# Altium PCB GT1022_V3.PcbDoc (part 1 of 2)
Units mm, origin at the board's own origin, x right, y up, seen from the top; angles counter-clockwise.
Board outline 37.01 x 59.52 mm, 4 copper layers (L1, L2, L3, L4), stack 0.734 mm thick; 114 components, 83 nets, 524 pads, 318 vias.
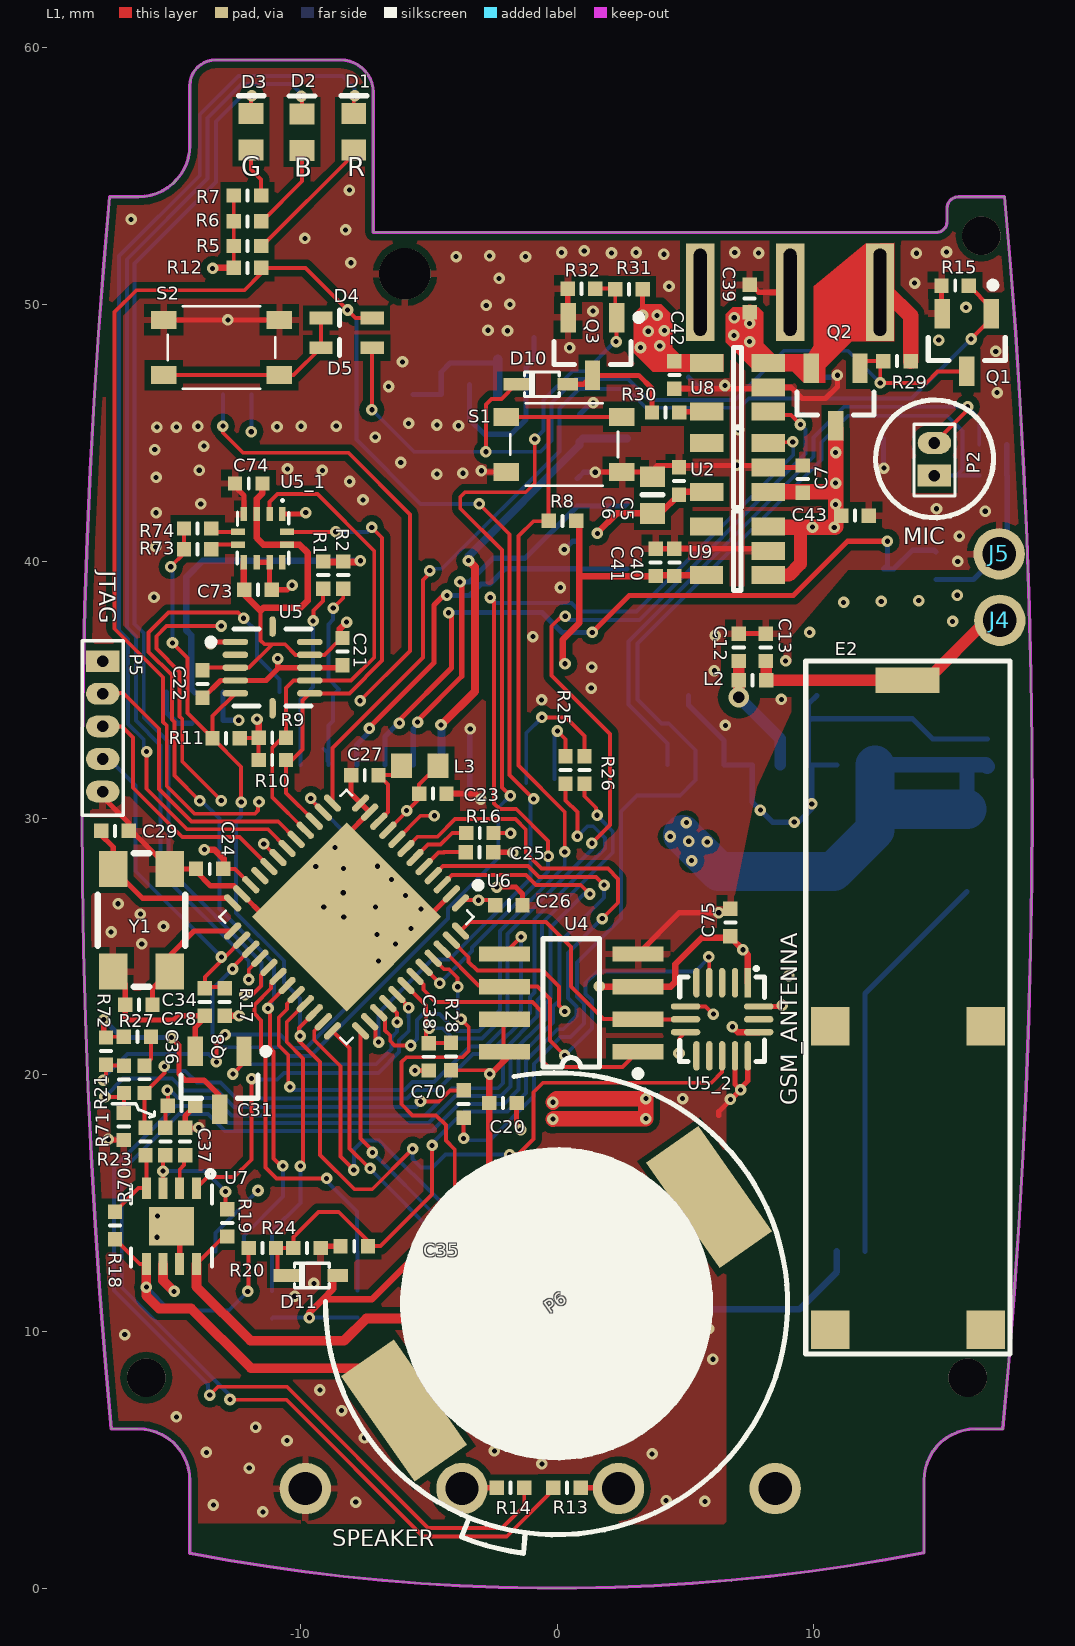
[diagram p0: L1 view]
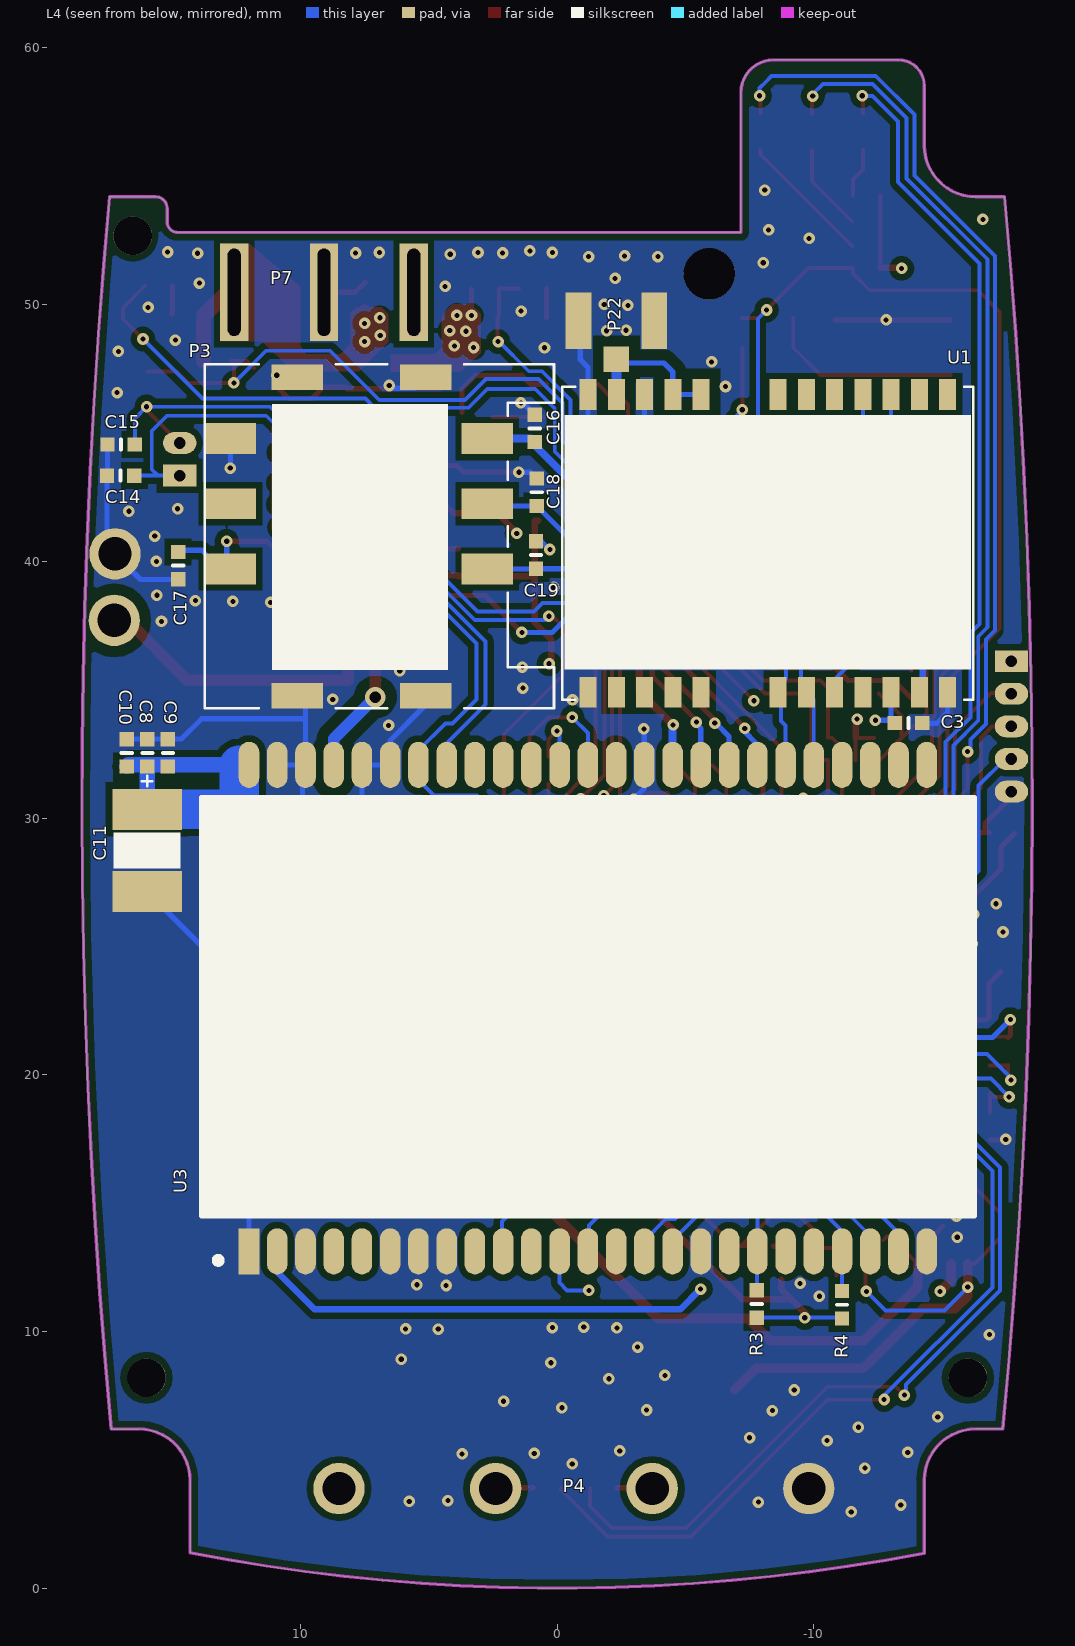
[diagram p1: L4 view, seen from below]
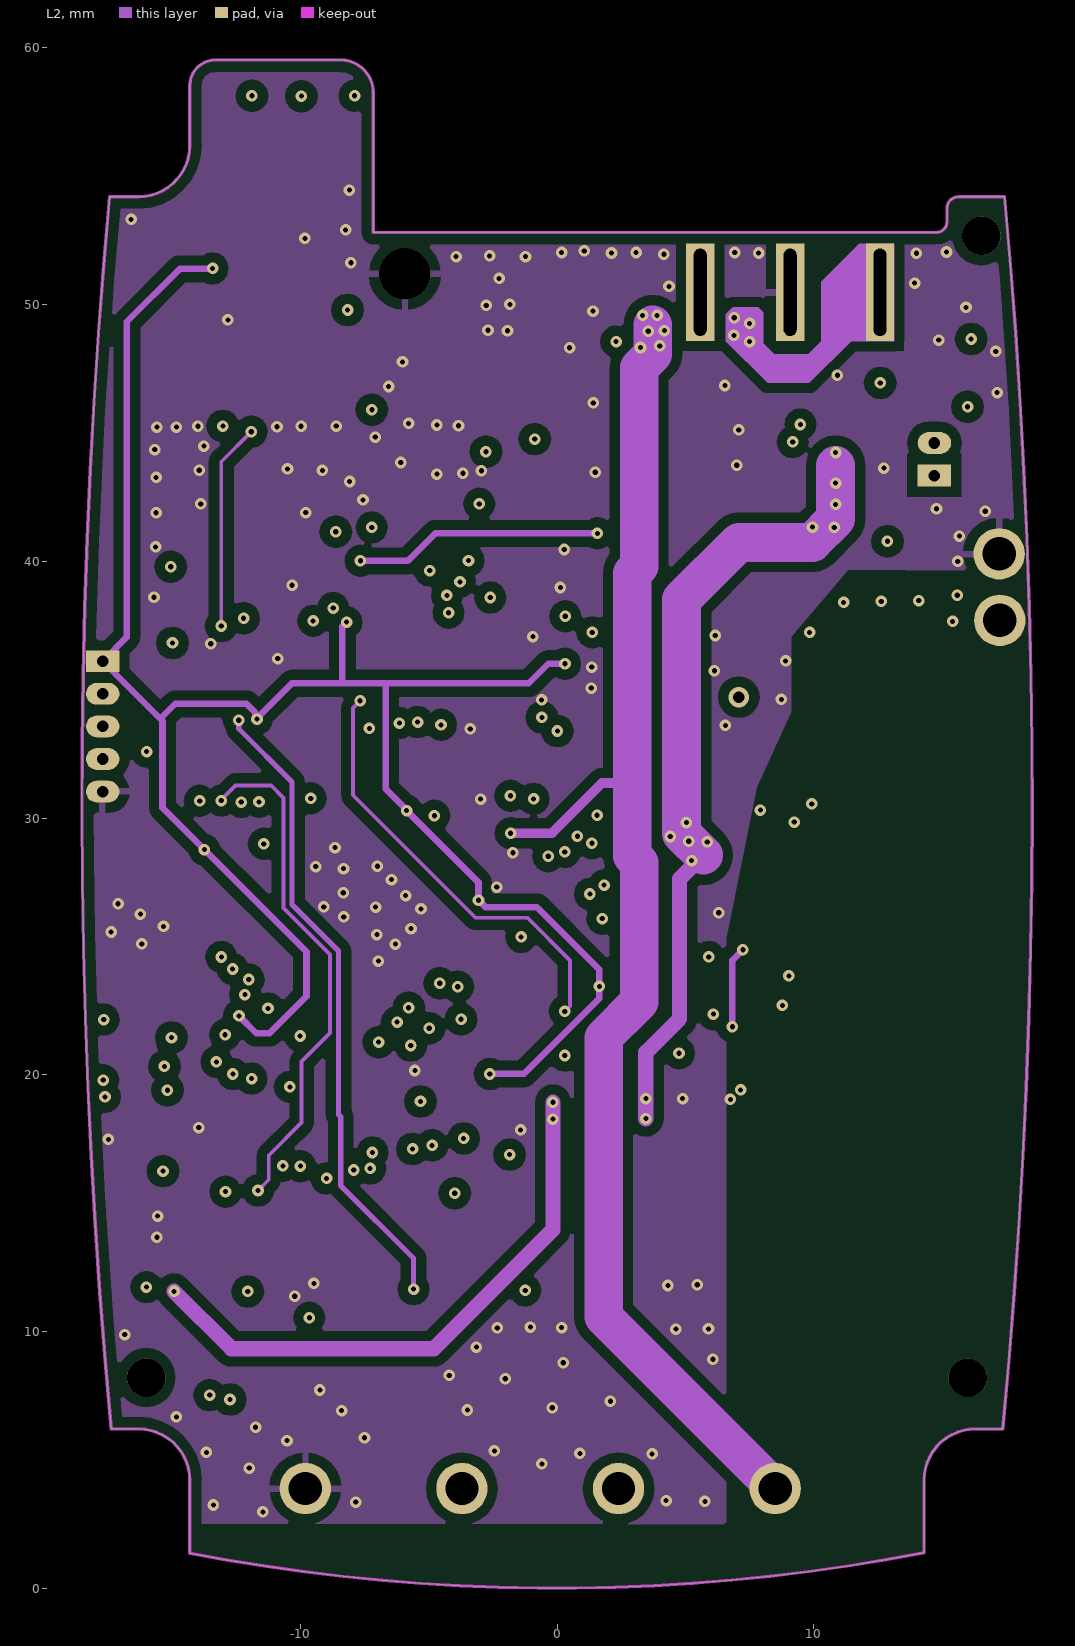
[diagram p2: L2]
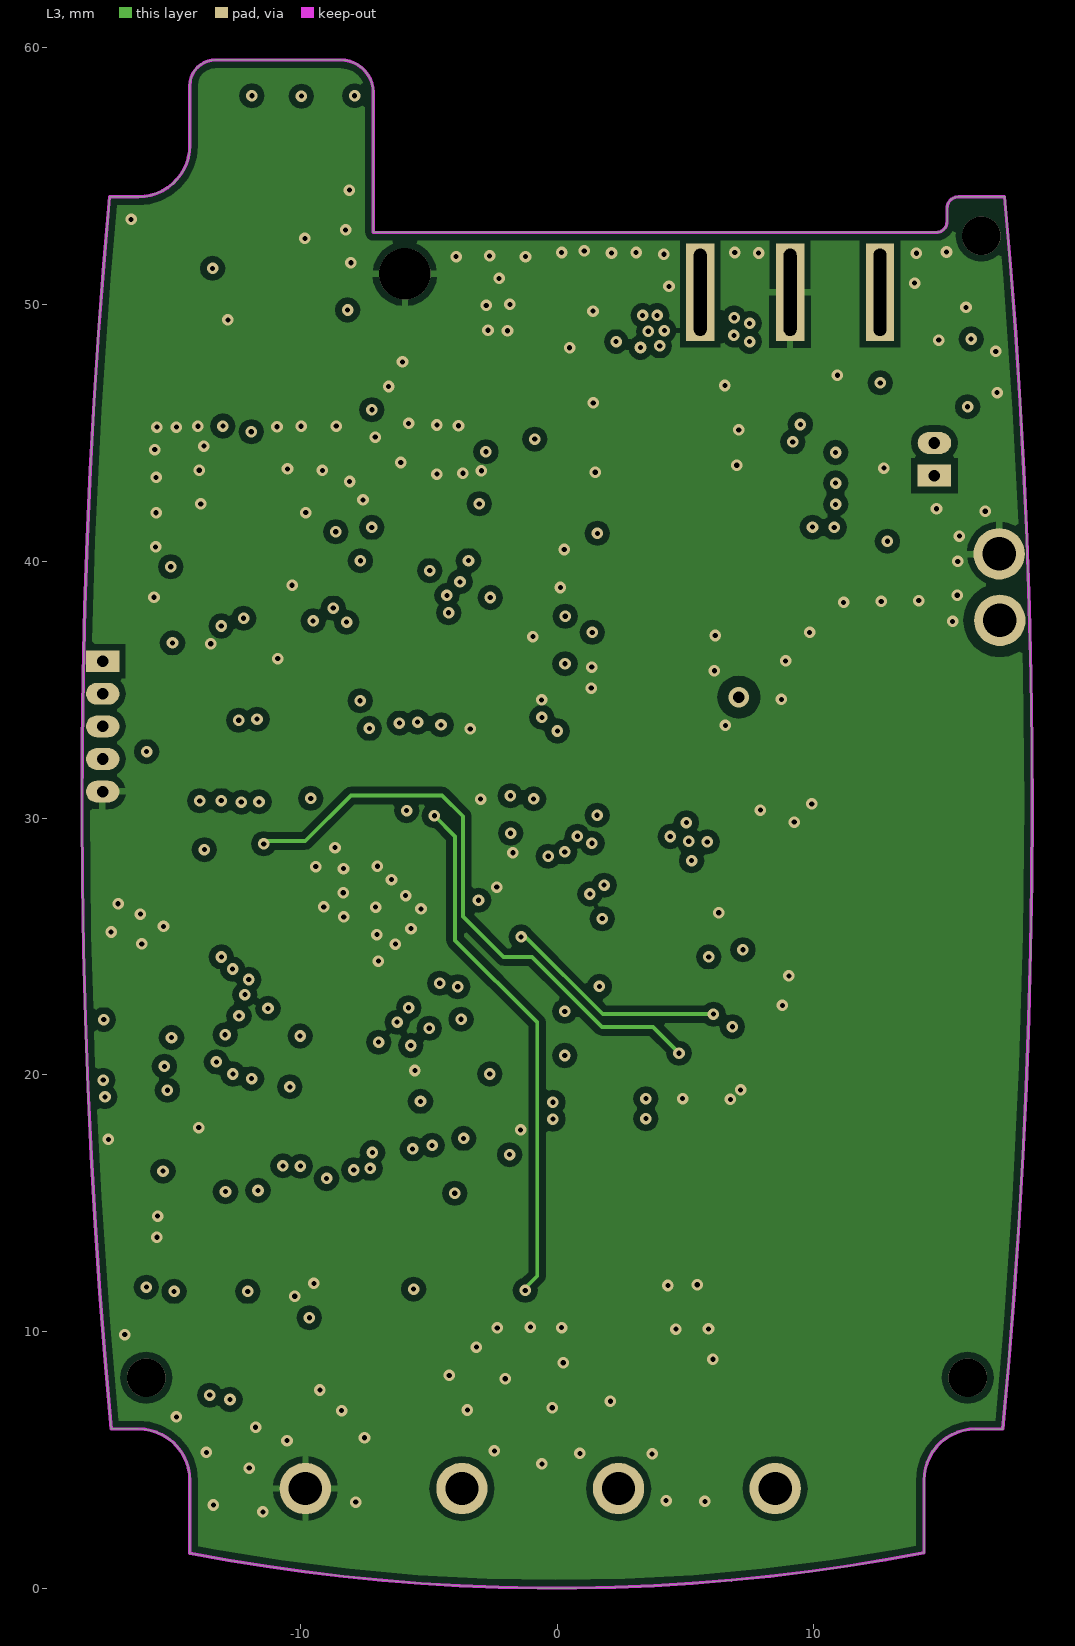
[diagram p3: L3]
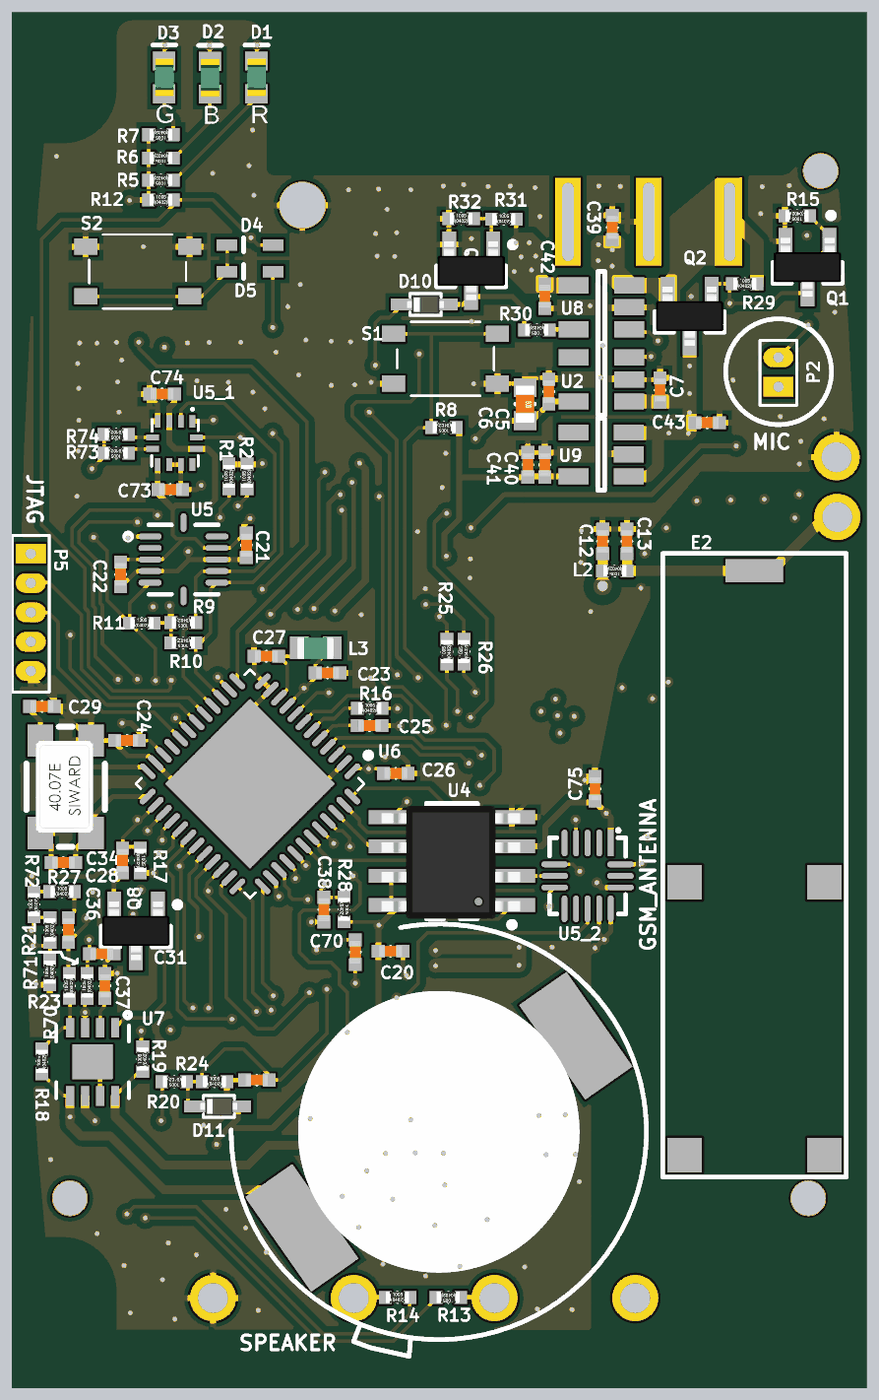
[diagram p5: 3D render of the assembled board from above, using the file's embedded part models]
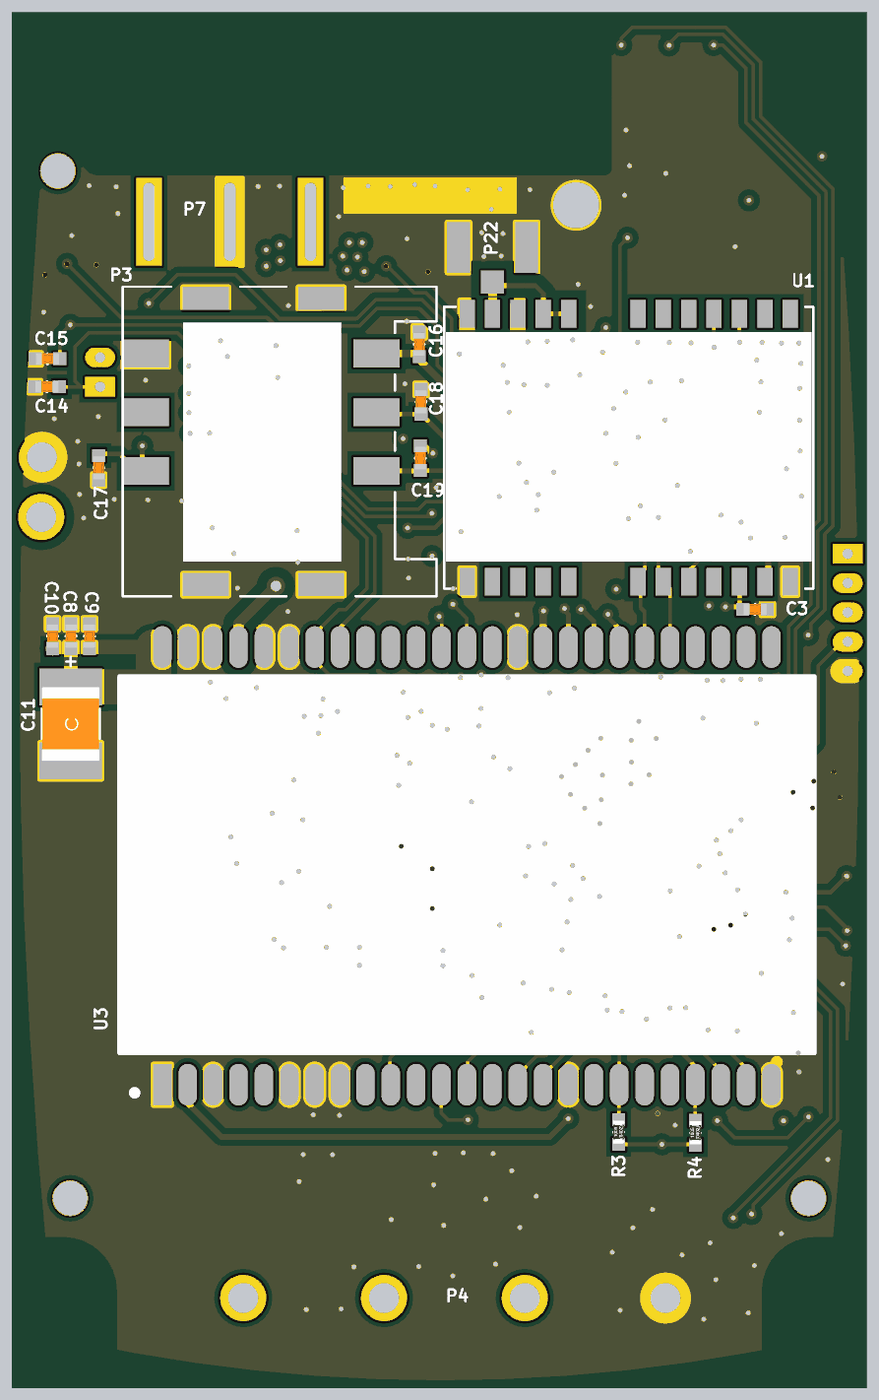
[diagram p6: 3D render of the assembled board from below, using the file's embedded part models]

## Layer stack, top to bottom
L1: signal copper 0.035
Dielectric: core 0.1981, FR-4, Dk 4.2
L2: signal copper 0.035
Dielectric: prepreg 0.1981, FR-4, Dk 4.2
L3: signal copper 0.035
Dielectric: core 0.1981, FR-4, Dk 4.2
L4: signal copper 0.035

## Board outline
-17.365,6.202 -16.305,6.202 cw(c-16.305,4.202) -14.305,4.202 -14.305,1.364 -14.306,1.363 ccw(c-0.048,75.346) 14.29,1.379 14.295,1.379 14.295,4.202 cw(c16.295,4.202) 16.295,6.202 16.298,6.198 17.365,6.198 ccw(c-242.05,30.57) 17.434,54.203 17.432,54.202 15.64,54.202 ccw(c15.64,53.752) 15.19,53.752 15.19,53.23 cw(c14.77,53.23) 14.77,52.81 -7.16,52.81 -7.16,58.26 ccw(c-8.43,58.26) -8.43,59.53 -13.305,59.53 ccw(c-13.305,58.53) -14.305,58.53 -14.305,56.202 cw(c-16.305,56.202) -16.305,54.202 -17.433,54.202 -17.433,54.204 ccw(c242.051,30.571)

## Design rules (kind name [scope] priority, off if disabled: settings)
Clearance L2-GND [InNamedPolygon('L2-GND')] p1: gap=0.4
Clearance L4-L3-GND-GPS [InNamedPolygon('L1-GND') Or  InNamedPolygon('L3-GND') Or  InNamedPolygon('L4-GND') Or  InNamedPolygon('L2-GND') vs (InNet('NetC12_2') OR InNet('NetC13_2') OR InNet('NetP22_1'))] p2: gap=0.43
Clearance L1-L4-GND-RULE-ALL [InNamedPolygon('L1-GND') Or  InNamedPolygon('L3-GND') Or  InNamedPolygon('L4-GND') Or  InNamedPolygon('L2-GND')] p3: gap=0.254
Clearance [All] p4: gap=0.15
ComponentClearance [All] p1: gap=0 collisioncheckmode=3 verticalgap=0 showdistances=FALSE
MinimumSolderMaskSliver [All] p1: minsoldermaskwidth=0.025
PolygonConnect L4-Pol [All vs IsNamedPolygon('L4-GND')] p1: connectstyle=Direct reliefconductorwidth=0.254 reliefentries=4 polygonreliefangle="90 Angle"
PolygonConnect [All vs isvia] p2: connectstyle=Direct reliefconductorwidth=0.254 reliefentries=4 polygonreliefangle="90 Angle"
RoutingVias ThruVia [All] p1: holewidth=0.2 width=0.45 viastyle="Through Hole" minholewidth=0.152 minwidth=0.45 maxholewidth=0.711 maxwidth=0.45
SilkscreenOverComponentPads [All] p1: minsilkscreentomaskgap=0.01
SolderMaskExpansion [All] p1: expansion=0.102
Width [All] p1: maxlimit=2 minlimit=0.152 preferedwidth=0.152
25 further rules are at their usual default settings.

## Classes and differential pairs
component class GSM/GPS: C3 C5 C6 C7 C8 C9 C10 C11 C12 C13 C14 C15 C16 C17 C18 C19 C55 C56 C57 C58 C59 C66 C67 C69 D9 D14 E1 E2 E3 J4 J5 L2 L68 L69 P2 P3 P10 P22 P33 R1 R2 R3 R4 R77 R78 U1 U2 U3 U15 U33
component class Main: Buzzer1 C20 C21 C22 C23 C24 C25 C26 C27 C28 C29 C31 C34 C35 C36 C37 C68 C70 C73 C74 C75 C85 C86 C87 C88 C89 C90 C91 D1 D2 D3 D4 D5 D7 D8 D11 DZ1 F2 F3 L3 P4 P5 P6 P40 Q1 Q6 Q8 Q9 R5 R6 R7 R8 R9 R10 R11 R12 R13 R14 R15 R16 R17 R18 R19 R20 R21 R23 R24 R25 R26 R27 R58 R63 R67 R68 R70 R71 R72 R73 R74 R82 R83 R84 R85 R86 R87 R89 R93 R94 R95 R96 R97 R98 S1 S2 TP24 TP25 TP26 TP28 TP29 TP30 U4 U5 U5_1 U5_2 U6 U7 U13 Y1
component class "Power Supply": C38 C39 C40 C41 C42 C43 D10 F1 P7 P8 Q2 Q3 Q4 R28 R29 R30 R31 R32 R43 R44 R45 R49 R50 R88 TP23 U8 U9

## Components (designator, comment, footprint, x,y, rotation, side; value= is the part's Value field where it differs from the comment)
C3 "100nF-16V-20%" C0402 -13.69,33.7 r0 bottom
C5 "100nF-16V-20%" C0402 4.75,43.13 r270 top
C6 "10uF-6V3-20%" C0603 3.72,43.292 r270 top
C7 "1uF-6V3-20%" C0402 9.57,43.2 r270 top
C8 "15p-50V-5%" C0402 15.96,32.54 r90 bottom
C9 "33p-50V-5%" C0402 15.16,32.54 r90 bottom
C10 "1uF-6V3-20%" C0402 16.76,32.54 r270 bottom
C11 "100u, ceramic" C1210 15.97,28.94 r90 bottom
C12 "47p-50V-5%" C0402 7.08,36.65 r270 top
C13 "47p-50V-5%" C0402 8.13,36.65 r270 top
C14 "27p-50V-5%" C0402 17,43.34 r180 bottom
C15 "27p-50V-5%" C0402 16.98,44.55 r180 bottom
C16 "100nF-16V-20%" C0402 0.87,45.18 r90 bottom
C17 "47p-50V-5%" C0402 14.76,39.83 r90 bottom
C18 "47p-50V-5%" C0402 0.79,42.69 r270 bottom
C19 "47p-50V-5%" C0402 0.82,40.25 r270 bottom
C20 "100nF-16V-20%" C0402 -2.11,18.9 r0 top
C21 "100nF-16V-20%" C0402 -8.36,36.48 r90 top
C22 "100nF-16V-20%" C0402 -13.81,35.22 r90 top
C23 "100nF-16V-20%" C0402 -4.84,30.95 r0 top
C24 "100nF-16V-20%" C0402 -13.53,28.02 r180 top
C25 "100nF-16V-20%" C0402 -3.02,28.67 r0 top
C26 "100nF-16V-20%" C0402 -1.88,26.6 r180 top
C27 "100nF-16V-20%" C0402 -7.49,31.67 r0 top
C28 "100nF-16V-20%" C0402 -13.721,22.83 r90 top
C29 "22p-50V-5%" C0402 -17.217,29.5 r180 top
C31 "1uF-6V3-20%" C0402 -14.627,18.786 r0 top
C34 "22p-50V-5%" C0402 -16.29,22.73 r180 top
C35 "100p-50V-5%" C0402 -7.901,13.322 r0 top
C36 "1uF-6V3-20%" C0402 -16.07,19.823 r90 top
C37 "100nF-16V-20%" C0402 -14.487,17.396 r270 top
C38 "100nF-16V-20%" C0402 -5,20.7 r90 top
C39 "10uF-6V3-20%" C0402 7.5,50.24 r270 top
C40 "100nF-16V-20%" C0402 3.84,39.96 r270 top
C41 "1uF-6V3-20%" C0402 4.57,39.96 r90 top
C42 "1uF-6V3-20%" C0402 4.57,47.26 r90 top
C43 "1uF-6V3-20%" C0402 11.61,41.78 r0 top
C70 "1uF-6V3-20%" C0402 -3.64,18.86 r270 top
C73 "100nF-16V-20%" C0402 -11.65,38.89 r180 top
C74 "100nF-16V-20%" C0402 -12.01,43.03 r0 top
C75 "100nF-16V-20%" C0402 6.75,25.93 r270 top
D1 "LED BLUE" LED0603-G -7.921,56.733 r0 top
D2 "LED RED" LED0603-G -9.936,56.719 r0 top
D3 "LED GREEN" LED0603-G -11.921,56.733 r0 top
D4 "BAT43XV2" SOD-523F#1 -8.2,49.48 r270 top
D5 "BAT43XV2" SOD-523F#1 -8.2,48.32 r270 top
D10 "BAT43XV2" SOD-523F#2 -0.59,46.9 r180 top
D11 "BAT43XV2" SOD-523F#2 -9.55,12.18 r180 top
E2 "GSM Antena conecter" A10343-GSM850/900/1800/1900/WCDMA 9.69,21.88 r270 top locked
J4 "touch_pin" TOUCH_PIN 17.25,37.7 r0 top
J5 "touch_pin" TOUCH_PIN 17.22,40.29 r0 top
L2 "12nH-5%" R0402 7.61,35.37 r180 top
L3 "1uH" L0603 -6.062,32.04 r0 top
P2 "MIC" HEADER_1.27mm_2PIN 14.7,43.34 r90 top locked
P3 "SIM CARD HOLDER" MICRO_SIM_SOCKET 7.72,40.97 r180 bottom locked
P4 "USB" GT102X_HOUSING_USB_NNECTOR 8.495,3.882 r180 bottom locked
P5 "JTAG" HEADER_1.27mm_5PIN -17.7,36.11 r270 top
P6 "Spk" SPEAKER-S12A28 -0.02,11.08 r125 top locked
P7 "Header 3" BAT_CON 12.579,50.48 r180 bottom locked
P22 "GPS Antena Connecter(NA)" "IPX SMD PCB Plug" -2.31,48.62 r0 bottom
Q1 "BSS138" SOT23-3 15.96,48.52 r270 top locked
Q2 "AO3401A" SOT23-3 10.85,46.4 r270 top locked
Q3 "BSS138" SOT23-3 1.38,48.37 r270 top
Q8 "BSS138" SOT23-3 -13.144,19.785 r270 top
R1 "4k7-5%" R0402 -9.11,39.46 r90 top
R2 "4k7-5%" R0402 -8.33,39.46 r90 top
R3 "10k-5%" R0402 -7.78,11.07 r90 bottom
R4 "10k-5%" R0402 -11.1,11.04 r90 bottom
R5 "1k-5%" R0402 -12.061,52.283 r180 top
R6 "1k-5%" R0402 -12.061,53.243 r180 top
R7 "1k-5%" R0402 -12.061,54.253 r180 top
R8 "100k-5%" R0402 0.21,41.577 r180 top
R9 "4k7-5%" R0402 -11.093,33.128 r180 top
R10 "4k7-5%" R0402 -11.093,32.258 r180 top
R11 "10k-5%" R0402 -12.89,33.11 r0 top
R12 "100k-5%" R0402 -12.061,51.43 r0 top
R13 "22-5%" R0402 0.39,3.91 r180 top
R14 "22-5%" R0402 -1.81,3.91 r0 top
R15 "100k-5%" R0402 15.51,50.74 r180 top
R16 "22-5%" R0402 -3.01,29.42 r0 top
R17 "10k-5%" R0402 -12.951,22.83 r270 top
R18 "47k-5%" R0402 -17.22,14.13 r90 top
R19 "47k-5%" R0402 -12.85,14.23 r90 top
R20 "4k7-5%" R0402 -11.48,13.25 r180 top
R21 "4k7-5%" R0402 -15.257,17.396 r90 top
R23 "4k7-5%" R0402 -16.034,17.399 r90 top
R24 "4k7-5%" R0402 -9.741,13.252 r0 top
R25 "4k7-5%" R0402 0.33,31.87 r90 top
R26 "4k7-5%" R0402 1.07,31.87 r90 top
R27 "4k7-5%" R0402 -16.35,21.48 r0 top
R28 "10k-5%" R0402 -4.13,20.71 r270 top
R29 "100k-5%" R0402 13.24,47.8 r0 top
R30 "1k1-5%" R0402 4.23,45.8 r180 top
R31 "100k-5%" R0402 2.8,50.6 r0 top
R32 "100k-5%" R0402 0.95,50.62 r0 top
R70 "10k-5%" R0402 -16.88,17.99 r90 top
R71 "10k-5%" R0402 -16.87,19.82 r90 top
R72 "4k7-5%" R0402 -17.57,20.92 r90 top
R73 "4k7-5%" R0402 -14,40.47 r180 top
R74 "4k7-5%" R0402 -14,41.28 r180 top
S1 "SW-DPST" BUTTON-TVAF11-025B-R 0.275,44.552 r270 top locked
S2 "SW-DPST" BUTTON-TVAF11-025B-R -13.071,48.33 r90 top locked
U1 "GT1612" GT1612 -8.21,40.7 r0 bottom locked
U2 "XC6209B332MRN_SOT-25" SOT23-5 7.03,43.653 r180 top locked
U3 "LEON G100" U-BLOX-G100 -1.2,22.595 r90 bottom locked
U4 "MX25L8005MC-15G_SOP-8L" SO8-150mil 0.55,22.8 r90 top
U5 "MMA7660FC" MMA7660FC -11.083,35.858 r0 top locked
U5_1 "BMA250" BMA250 -11.45,40.9 r270 top
U5_2 "ADXL362" ADXL362 6.43,22.16 r270 top
U6 "MKL25Z128VFT4" QFN50P700X700X80-48M -8.201,26.146 r225 top locked
U7 "TPA6203A1_DRB_8" DRB8_1P75X1P5 -15.024,14.107 r270 top
U8 "EMC5754" SOT23-5 7.03,46.78 r180 top locked
U9 "XC6209B332MRN_SOT-25" SOT23-5 7.02,40.41 r180 top
Y1 "8.000 MHZ" "SMD CRYSTAL 4 x 2.5" -16.19,26.02 r90 top

## Footprints (in the part's own frame and the unit in brackets; to place one, negate y for a bottom-side part, rotate by r counter-clockwise, add the part's x,y. Pads: shape width x height; smd on the part's side, far side on the other; paste and mask are expansions set on the pad)
A10343-GSM850/900/1800/1900/WCDMA [mm] "http://www.antenova-m2m.com/products/giganova-standard-antennas"
  rect 1x2.5 smd: 1(-13.49,3.96)
  rect 1.5x1.5 smd: 2(11.81,0.95) 3(11.81,7) 4(0,7) 5(0,0.95)
  silkscreen extent -14.24,0 12.76,7.95, body extent -14.25,0 12.76,7.95, height 3.3
ADXL362 [mm] "QFN, 16-Leads, Body 3.3x3.3mm (max), Pitch 0.50mm, IPC Medium Density"
  rect 1.15x0.25 smd: 1(-1.425,1)
  oval 1.15x0.25 smd: 2(-1.425,0.5) 3(-1.425,0) 4(-1.425,-0.5) 5(-1.425,-1) 9(1.425,-1) 10(1.425,-0.5) 11(1.425,0) 12(1.425,0.5) 13(1.425,1)
  oval 0.25x1.15 smd: 6(-0.5,-1.425) 7(0,-1.425) 8(0.5,-1.425) 14(0.5,1.425) 15(0,1.425) 16(-0.5,1.425)
  silkscreen extent -1.99,-1.65 1.65,1.65, body extent -1.65,-1.65 1.65,1.65, height 0.83
BAT_CON [mm]
  rect 1.1x3.8 hole 0.5 slot 3.4 at 90 deg: 1(0,0) 2(3.5,0) 3(7,0)
  body extent -0.23,-1.5 7.23,1.5, height 7
BMA250 [mm] "Accelerometer"
  rect 0.55x0.25 smd: 1(-0.94,0.75) 2(-0.94,0.25) 3(-0.94,-0.25) 4(-0.94,-0.75) 7(0.935,-0.75) 8(0.935,-0.25) 9(0.935,0.25) 10(0.935,0.75)
  rect 0.25x0.55 smd: 5(-0.25,-0.975) 6(0.25,-0.975) 11(0.25,0.93) 12(-0.25,0.93)
  silkscreen extent -1.47,-1.01 1,1, body extent -1,-1 1,1, height 0.83
BUTTON-TVAF11-025B-R [mm] "TVAF11-025B-R"
  rect 0.7x1 smd: 1(1.075,2.25) 2(1.075,-2.25) 3(-1.075,2.25) 4(-1.075,-2.25)
  silkscreen extent -1.6,-2.1 1.6,2.1, body extent -1.6,-2.1 1.6,2.1, height 2.5
C0402 [mil]
  rect 22x22 smd: 1(-21,0) 2(21,0)
  silkscreen extent 0,-8 0,8, body extent -20,-10 20,10, height 20
C0603 [mil]
  rect 32x38 smd: 1(0,0) 2(56,0)
  silkscreen extent 28,-16 28,16, body extent -4,-16 59,16, height 12
C1210 [mm] "Chip Capacitor; Body 3.2 x 2.5 mm (LxW typ)"
  rect 1.6x2.7 smd: 1(1.4,0) 2(-1.8,0)
  silkscreen extent -0.9,-1.3 2.7,1.3, body extent -2.3,-1.35 1.9,1.35
DRB8_1P75X1P5 [mm]
  rect 0.85x0.35 smd: 1(-1.475,0.975) 2(-1.475,0.325) 3(-1.475,-0.325) 4(-1.475,-0.975) 5(1.475,-0.975) 6(1.475,-0.325) 7(1.475,0.325) 8(1.475,0.975)
  rect 1.5x1.75 smd: 9(0,0)
  silkscreen extent -2.16,-1.57 1.57,1.65
GT102X_HOUSING_USB_NNECTOR [mm]
  round 2 hole 1.3: 1(0,0) 2(6.1,0) 3(12.2,0) 4(18.3,0)
  body extent -1.01,-1.01 19.32,1.01, height 4.1
GT1612 [mm]
  rect 0.66x1.2 smd: 1(-7,-5.8) 2(-5.9,-5.8) 3(-4.8,-5.8) 4(-3.7,-5.8) 5(-2.6,-5.8) 6(-1.5,-5.8) 7(-0.4,-5.8) 8(2.6,-5.8) 9(3.7,-5.8) 10(4.8,-5.8) 11(5.9,-5.8) 12(7,-5.8) 13(7,5.8) 14(5.9,5.8) 15(4.8,5.8) 16(3.7,5.8) 17(2.6,5.8) 18(-0.4,5.8) 19(-1.5,5.8) 20(-2.6,5.8) 21(-3.7,5.8) 22(-4.8,5.8) 23(-5.9,5.8) 24(-7,5.8)
  silkscreen extent -8,-6.1 8,6.1, body extent -8,-6.1 8,6.1, height 2.5
HEADER_1.27mm_2PIN [mm]
  rect 0.85x1.3 hole 0.45: 1(0,0)
  oval 0.85x1.3 hole 0.45: 2(1.27,0)
  silkscreen extent -0.8,-0.8 2,0.8
HEADER_1.27mm_5PIN [mm]
  rect 0.85x1.3 hole 0.45: 1(0,0)
  oval 0.85x1.3 hole 0.45: 2(1.27,0) 3(2.54,0) 4(3.81,0) 5(5.08,0)
  silkscreen extent -0.8,-0.8 6,0.8
"IPX SMD PCB Plug" [mm]
  rect 1x1 smd: 1(0,0.75)
  rect 1x2.2 smd: 2(1.475,-0.75) 3(-1.475,-0.75)
L0603 [mil]
  rect 32x38 smd: 1(0,0) 2(56,0)
  body extent -4,-20 59,18, height 16
LED0603-G [mil]
  rect 38x32 smd: 1(0,-28) 2(0,28)
  silkscreen extent -19,55 20,55, body extent -16,-32 16,32, height 43
MICRO_SIM_SOCKET [mm] "http://www.fcn.com.tw/zh/product/ProductList.aspx?Type=13"
  rect 2x1.2 smd: 1(5,3.81) 2(5,1.27) 3(5,-1.27) 5(-5,3.81) 6(-5,1.27) 7(-5,-1.27)
  rect 2x1 smd: 8(-2.4,-6.2) 9(2.6,-6.2) 10(2.6,6.2) 11(-2.4,6.2)
  silkscreen extent -6,-6.7 7.6,6.7, body extent -6,-6.7 7.6,6.7, height 2.6
MMA7660FC [mm] "QFN, 12-Leads, Body 3,0x3,0mm (max), Pitch 0,50mm, IPC Medium Density"
  oval 1x0.25 smd: 1(-1.45,1) 2(-1.45,0.5) 3(-1.45,0) 4(-1.45,-0.5) 5(-1.45,-1) 6(1.45,-1) 7(1.45,-0.5) 8(1.45,0) 9(1.45,0.5) 10(1.45,1)
  oval 0.25x0.8 smd: 11(0,-1.58) 12(0,1.6)
  silkscreen extent -2.52,-1.5 1.5,1.5, body extent -1.5,-1.5 1.5,1.5, height 0.9
QFN50P700X700X80-48M [mm] "QFN, 48-Leads, Body 7.0x7.0mm (max), Pitch 0.50mm, IPC Low Density"
  oval 0.85x0.254 smd: 1(-3.525,2.75) 2(-3.525,2.25) 3(-3.525,1.75) 4(-3.525,1.25) 5(-3.525,0.75) 6(-3.525,0.25) 7(-3.525,-0.25) 8(-3.525,-0.75) 9(-3.525,-1.25) 10(-3.525,-1.75) 11(-3.525,-2.25) 12(-3.525,-2.75) 25(3.525,-2.75) 26(3.525,-2.25) 27(3.525,-1.75) 28(3.525,-1.25) 29(3.525,-0.75) 30(3.525,-0.25) 31(3.525,0.25) 32(3.525,0.75) 33(3.525,1.25) 34(3.525,1.75) 35(3.525,2.25) 36(3.525,2.75)
  oval 0.254x0.85 smd: 13(-2.75,-3.525) 14(-2.25,-3.525) 15(-1.75,-3.525) 16(-1.25,-3.525) 17(-0.75,-3.525) 18(-0.25,-3.525) 19(0.25,-3.525) 20(0.75,-3.525) 21(1.25,-3.525) 22(1.75,-3.525) 23(2.25,-3.525) 24(2.75,-3.525) 37(2.75,3.525) 38(2.25,3.525) 39(1.75,3.525) 40(1.25,3.525) 41(0.75,3.525) 42(0.25,3.525) 43(-0.25,3.525) 44(-0.75,3.525) 45(-1.25,3.525) 46(-1.75,3.525) 47(-2.25,3.525) 48(-2.75,3.525)
  rect 5.2x5.2 smd: 49(0,0)
  silkscreen extent -4.62,-3.5 3.5,3.5, body extent -3.5,-3.5 3.5,3.5, height 0.8
R0402 [mil]
  rect 22x22 smd: 1(-21,0) 2(21,0)
  silkscreen extent 0,-8 0,8, body extent -20,-10 20,10, height 14
"SMD CRYSTAL 4 x 2.5" [mm]
  rect 1.4x1.1 smd: 1(-2,-1.1) 2(2,-1.1) 3(2,1.1) 4(-2,1.1)
  silkscreen extent -2.6,-1.7 2.6,1.7, body extent -2,-1.2 2,1.3, height 0.63
SO8-150mil [mm] "Small Outline; 8 Leads; Body Width 3.9 mm; Pitch 1.27 mm"
  rect 0.6x2 smd: 1(-1.905,-2.6) 2(-0.635,-2.6) 3(0.635,-2.6) 4(1.905,-2.6) 5(1.905,2.6) 6(0.635,2.6) 7(-0.635,2.6) 8(-1.905,2.6)
  silkscreen extent -2.88,-2.72 2.5,1.1, body extent -2.5,-2.95 2.4,3.05, height 1.7
SOD-523F#1 [mm] "Molded Inductor, 2-Leads, Body 1.2x0.8mm, IPC Medium Density"
  rect 0.5x0.9 smd: 1(0,-1) 2(0,1)
  silkscreen extent -0.31,-0.28 0.29,-0.28, body extent -0.45,-0.65 0.45,0.65, height 0.7
SOD-523F#2 [mm]
  rect 0.8x0.5 smd: 1(-1,0)
  rect 1x0.5 smd: 2(1,0)
  silkscreen extent -0.67,-0.48 0.67,0.48, body extent -0.8,-0.4 0.8,0.4, height 0.72
SOT23-3 [mm] "SOT23, 3-Leads, Body 2.9x1.3mm, Pitch 0.95mm, Lead Span 2.4mm, IPC Medium Density"
  rect 1.15x0.6 smd: 1(-1.125,0.95) 2(-1.125,-0.95) 3(1.125,0)
  silkscreen extent -2.36,-1.5 0.7,1.5, body extent -1.27,-1.46 1.28,1.46, height 0.99
SOT23-5 [mm] "SOT23, 5-Leads, Body 2.9x1.6mm, Pitch 0.95mm, Lead Span 2.8mm, IPC Low Density"
  rect 1.3x0.7 smd: 1(-1.2,0.95) 2(-1.2,0) 3(-1.2,-0.95) 4(1.2,-0.95) 5(1.2,0.95)
  silkscreen extent -0.15,-1.55 0.15,1.55, body extent -0.9,-1.55 0.9,1.55, height 1.45
SPEAKER-S12A28 [mm]
  rect 5x2.5 smd: 1(0,7.25) 2(0,-7.25)
  silkscreen extent -9,-9 8.2,9, body extent -9,-9 9,9, height 4.3
TOUCH_PIN [mm]
  round 2 hole 1.3: 1(0,0)
  body extent -1,-1.01 1.02,1.01, height 4.1
U-BLOX-G100 [mm]
  rect 1.8x0.8 smd: 1(-9.475,13.2)
  oval 1.8x0.8 smd: 2(-9.475,12.1) 3(-9.475,11) 4(-9.475,9.9) 5(-9.475,8.8) 6(-9.475,7.7) 7(-9.475,6.6) 8(-9.475,5.5) 9(-9.475,4.4) 10(-9.475,3.3) 11(-9.475,2.2) 12(-9.475,1.1) 13(-9.475,0) 14(-9.475,-1.1) 15(-9.475,-2.2) 16(-9.475,-3.3) 17(-9.475,-4.4) 18(-9.475,-5.5) 19(-9.475,-6.6) 20(-9.475,-7.7) 21(-9.475,-8.8) 22(-9.475,-9.9) 23(-9.475,-11) 24(-9.475,-12.1) 25(-9.475,-13.2) 26(9.475,-13.2) 27(9.475,-12.1) 28(9.475,-11) 29(9.475,-9.9) 30(9.475,-8.8) 31(9.475,-7.7) 32(9.475,-6.6) 33(9.475,-5.5) 34(9.475,-4.4) 35(9.475,-3.3) 36(9.475,-2.2) 37(9.475,-1.1) 38(9.475,0) 39(9.475,1.1) 40(9.475,2.2) 41(9.475,3.3) 42(9.475,4.4) 43(9.475,5.5) 44(9.475,6.6) 45(9.475,7.7) 46(9.475,8.8) 47(9.475,9.9) 48(9.475,11) 49(9.475,12.1) 50(9.475,13.2)
  silkscreen extent -9.95,-15.05 8.2,15.05, body extent -9.5,-15.05 9.5,15.05, height 3.2

## Part data
C3 C5 C16 C20 C21 C22 C23 C24 C25 C26 C27 C28 C37 C38 C40 C73 C74 C75: library part Cap, "CAP CER 0.1UF 16V Y5V 0402"
C6 C39: library part Cap, "CAP CER 10UF 6.3V 20% X5R 0603"
C7 C10 C31 C36 C41 C42 C43 C70: library part Cap, "CAP CER 1UF 6.3V Y5V 0402"
C8: library part Cap, "CAP CER 15PF 50V 5% NPO 0402"
C9: library part Cap, "CAP CER 33PF 50V 5% NPO 0402"
C11: library part "Cap Pol3", "CAP CER 100UF 10V 20% X5R 1812"
C12 C13 C17 C18 C19: library part Cap, "CAP CER 47PF 50V 5% NPO 0402"
C14 C15: library part Cap, "CAP CER 27PF 50V 5% NPO 0402"
C29 C34: library part Cap, "CAP CER 22PF 50V 5% NPO 0402"
C35: library part Cap, "CAP CER 100PF 50V 5% NPO 0402"
D1: library part LED2, "LED BLUE CLEAR THIN 0603 SMD"
D2: library part LED2, "LED RED CLEAR THIN 0603 SMD"
D3: library part LED2, "LED GREEN CLEAR THIN 0603 SMD"
D4 D5 D10 D11: library part Diode, "Diode Type SMD"
E2 P5: library part "Header 5", "Header, 5-Pin"
J4 J5: library part Socket, "Socket"
L2: library part Inductor, "INDUCTOR 12NH 300MA 0402"
L3: library part Inductor, "INDUCTOR 1.0UH 150MA 0603"
P2 P6: library part "Header 2", "Header, 2-Pin"
P3: library part "SIM CARD", "SIM _CONNECTOR_410108105011-2LF"
P4: library part "Header 4", "Header, 4-Pin"
P7: "Header, 3-Pin"
P22: library part "Header 3", "GPS Antena"
Q1 Q3 Q8: library part MOSFET-P, "MOSFET N-CH 50V 200MA SOT23-3"
Q2: library part MOSFET-P, "MOSFET P-CH -30V -4.3A SOT23"
R1 R2 R9 R10 R20 R21 R23 R24 R25 R26 R27 R72 R73 R74: library part Res1, "RES 4.7K OHM 1/16W 5% 0402 SMD"
R3 R4 R11 R17 R28 R70 R71: library part Res1, "RES 10K OHM 1/16W 5% 0402 SMD"
R5 R6 R7: library part Res1, "RES 1.0K OHM 1/16W 5% 0402 SMD"
R8 R12 R15 R29 R31 R32: library part Res1, "RES 100K OHM 1/16W 5% 0402 SMD"
R13 R14 R16: library part Res1, "RES 22 OHM 1/16W 5% 0402 SMD"
R18 R19: library part Res1, "RES 47K OHM 1/16W 5% 0402 SMD"
R30: library part Res1, "RES 1.1K OHM 1/16W 5% 0402 SMD"
S1 S2: "Double-Pole, Single-Throw Switch"
U1: library part GPS-GT1612
U3: library part ublox
U4: library part FlashIC
U5: "ACCELEROMETER 3X3 DGTL 10-DFN"
U5_1: "3-AXIS ACCELEROMETER DIGITAL I/F"
U5_2: library part ADCL362, "IC ACCEL DIG LO PWR 3AX 16LGA"
U6: "IC ARM CORTEX MCU 128KB 48QFN"
U7: "IC AMP AUDIO PWR 1.25W MONO 8SON"
Y1: library part CRYSTAL-SMT, "CRYSTAL 8.000 MHZ 18PF SMD"

## Free pads (board coordinates)
  round 0.127 on Mech7: 1(-17.311,43.735) 1(-17.311,43.735) 1(-17.311,44.37) 1(-17.311,44.37) 1(-17.311,44.751) 1(-17.311,44.751) 1(-17.311,45.386) 1(-17.311,45.386) 1(-17.311,45.767) 1(-17.311,45.767) 1(-17.311,46.402) 1(-17.311,46.402) 1(-16.041,43.735) 1(-16.041,43.735) 1(-16.041,44.37) 1(-16.041,44.37) 1(-16.041,44.751) 1(-16.041,44.751) 1(-16.041,45.386) 1(-16.041,45.386) 1(-16.041,45.767) 1(-16.041,45.767) 1(-16.041,46.402) 1(-16.041,46.402)
  round 0.127 on Mech4: 1(-16.321,46.407) 1(-16.321,46.407) 1(5.346,49.003) 1(5.346,49.003) 1(5.346,52.003) 1(5.346,52.003) 1(5.846,49.003) 1(5.846,49.003) 1(5.846,52.003) 1(5.846,52.003) 1(8.834,49.003) 1(8.834,49.003) 1(8.834,52.003) 1(8.834,52.003) 1(9.334,49.003) 1(9.334,49.003) 1(9.334,52.003) 1(9.334,52.003) 1(12.334,49.003) 1(12.334,49.003) 1(12.334,52.003) 1(12.334,52.003) 1(12.834,49.003) 1(12.834,49.003) 1(12.834,52.003) 1(12.834,52.003)
  round 0.127 on Mech5: 1(-16.305,6.202) 1(-16.305,6.202) 1(-14.305,4.202) 1(-14.305,4.202) 1(14.295,4.202) 1(14.295,4.202) 1(16.295,6.202) 1(16.295,6.202) 1(16.655,8.202)
  round 1.5 hole 1.5: 1(-16.005,8.202) 1(15.995,8.202) 1(16.529,52.683)
  round 0.127 on Mech6: 1(-15.914,40.941) 1(-11.414,40.941)
  round 0.127 on Mech2: 1(-14.15,45.724) 1(-14.15,45.724) 1(-14.15,48.924) 1(-14.15,48.924) 1(-12.866,46.752) 1(-12.866,46.752) 1(-12.866,48.022) 1(-12.866,48.022) 1(-10.961,46.752) 1(-10.961,46.752) 1(-10.961,48.022) 1(-10.961,48.022) 1(-9.65,45.724) 1(-9.65,45.724) 1(-9.65,48.924) 1(-9.65,48.924) 1(-1.577,42.834) 1(-1.577,42.834) 1(-1.577,46.034) 1(-1.577,46.034) 1(-0.293,43.862) 1(-0.293,43.862) 1(-0.293,45.132) 1(-0.293,45.132) 1(1.612,43.862) 1(1.612,43.862) 1(1.612,45.132) 1(1.612,45.132) 1(2.923,42.834) 1(2.923,42.834) 1(2.923,46.034) 1(2.923,46.034)
  round 2 hole 2: 1(-5.93,51.2)

## Via types
v1: diameter 0.45, hole 0.2, L1 to L4, 317 vias
v2: diameter 0.8, hole 0.45, L1 to L4, 1 vias

## Nets (pads, with @x,y where several pads share a name; then routed paths per layer and width w, separated by ;. In a path a pad name is that pad's centre, name@x,y a point inside that pad or via, vN(x,y) a via of type N, cw(c..) or ccw(c..) an arc to the next point about the centre after c; other vN are vias at no path point)
3V3: C20.1 C21.2 C22.2 C23.1 C24.1 C26.2 C40.2 C41.1 C73.2 C74.2 C75.2 D11.1 L3.2 P5.1 R3.1 R4.1 R5.2 R6.2 R7.2 R8.1 R9.2 R10.2 R11.2 R12.1 R17.2 R28.2 U4.3 U4.7 U4.8 U5.3 U5.9 U5_1.3 U5_1.7 U5_1.11 U5_2.1 U5_2.14 U6.1 U6.9 U6.22 U9.5 | length 158.1
  L1 w0.152: C22.2@-13.81,35.753 -13.705,35.858 U5.3@-12.533,35.858 -12.002,35.858 -11.09,36.77 ; C24.1@-12.997,28.02 -12.55,28.02 U6.22@-11.931,27.402 ; R12.1@-12.594,51.43 R5.2@-12.594,52.283 R6.2@-12.594,53.243 R7.2@-12.594,54.253 ; R11.2@-12.357,33.11 -11.644,33.11 R9.2@-11.626,33.128 R10.2@-11.626,32.258 ; C73.2@-12.183,38.703 C73.2@-12.183,38.89 ; -11.55,38.07 -11.55,36.92 -11.4,36.77 -11.09,36.77 ; C21.2@-8.46,36.963 -9.065,36.358 U5.9@-9.633,36.358 -10.188,36.358 -10.6,36.77 -11.09,36.77 ; U6.9@-6.593,29.523 C23.1@-5.339,30.776 ; C23.1@-5.373,30.95 -5.373,31.307 L3.2@-4.64,32.04 ; R28.2@-4.13,20.177 -2.622,20.177 -2.547,20.103 -2.527,20.083 v1@-2.47,20.025 ; U6.1@-3.764,26.694 -3.659,26.8 v1(-3.06,26.8) C26.2@-2.403,26.8 ; v1@-2.643,19.852 v1@-2.47,20.025 ; v1@-2.47,20.03 v1@-2.47,20.025 ; U4.8@-2.08,20.875 U4.7@-2.08,22.08 ; C40.2@3.84,39.427 C40.2@3.873,39.46
  L1 w0.254: v1(-13.74,28.77) -13.35,28.77 -12.99,28.41 -12.99,28.027 C24.1@-12.997,28.02 ; v1(-13.42,51.41) -13.4,51.43 R12.1@-12.594,51.43 ; R17.2@-12.951,22.297 -12.397,22.297 v1(-12.39,22.29) ; U5_1.7@-12.2,39.965 -12.2,38.907 C73.2@-12.183,38.89 ; C73.2@-12.183,38.703 -11.55,38.07 -11.42,38.2 -9.98,38.2 -9.72,38.46 -9.72,40.34 -10.03,40.65 U5_1.11@-10.52,40.65 -11.44,40.65 -11.7,40.91 U5_1.3@-11.7,41.84 -11.7,42.43 -11.477,42.653 C74.2@-11.477,43.03 ; R9.2@-11.626,33.128 v1@-11.626,33.686 ; v1(-9.65,10.537) -9.66,10.547 -9.66,10.72 -9.13,11.25 ; D11.1@-8.725,12.005 -8.725,11.655 -9.13,11.25 ; C21.2@-8.46,36.963 -8.46,37.37 v1(-8.2,37.63) ; v1@-2.643,19.852 C20.1@-2.643,18.9 -2.643,15.827 -7.22,11.25 -9.13,11.25 ; v1@-2.585,20.025 -2.527,20.083 U4.8@-1.8,20.81 ; v1@0.31,36.07 0.22,36.07 0.22,36.95 0.873,37.603 0.873,39.44 ; R8.1@0.743,41.577 0.873,41.577 0.873,39.44 ; v1(1.65,23.44) 1.655,23.435 U4.3@3.15,23.435 4.425,23.435 4.6,23.61 4.6,24.3 5.64,25.34 6.77,25.34 v1(7.24,24.87) 7.43,24.68 U5_2.1@7.43,23.585 ; C40.2@3.84,39.427 0.887,39.427 0.873,39.44 ; C40.2@3.873,39.46 U9.5@5.82,39.46 ; v1(6.83,21.87) 7.04,21.66 U5_2.14@7.855,21.66
  L2 w0.254: v1(-13.42,51.41) -13.4,51.41 -13.38,51.39 -14.699,51.39 -16.759,49.33 -16.759,37.051 P5.1@-17.7,36.11 -15.455,33.865 ; v1(-12.39,22.29) -11.72,21.62 -11.2,21.62 -9.76,23.06 -9.76,24.79 v1(-13.74,28.77) -15.37,30.4 -15.37,33.78 -15.455,33.865 ; v1(-8.2,37.63) -8.36,37.47 -8.36,35.25 ; v1(-5.86,30.29) -3.06,27.49 v1(-3.06,26.8) -2.79,26.53 -0.79,26.53 1.64,24.1 v1@1.64,23.43 ; v1@-5.86,30.32 -6.68,31.14 -6.68,35.23 -6.7,35.25 ; v1(-2.62,20.03) -1.3,20.03 1.64,22.97 v1@1.64,23.43 ; v1(0.31,36.01) -0.34,36.01 -1.1,35.25 -6.7,35.25 ; v1@1.65,23.43 v1@1.64,23.43 ; v1(1.65,23.44) v1@1.64,23.43 ; v1(6.83,21.87) 6.83,24.46 v1(7.24,24.87) ; -15.455,33.865 -14.87,34.45 -12.1,34.45 -11.76,34.11 -11.76,33.82 -10.33,35.25 -8.36,35.25 ; -8.36,35.25 -6.7,35.25
  L4 w0.152: R4.1@-11.1,10.507 -11.07,10.537 v1(-9.65,10.537) R3.1@-7.78,10.537
  other v1: -11.689,33.851
5V: C42.2 P4.1 R16.2 R31.2 U8.4 | length 59.9
  L1 w0.152: R16.2@-2.477,29.42 -1.82,29.42 v1(-1.81,29.41)
  L1 w0.2: R31.2@3.333,50.6 v1(3.333,49.58) 3.333,49.03 C42.2@4.57,47.793 5.767,47.793 U8.4@5.83,47.73
  L2 w0.381: v1(-1.81,29.41) -0.2,29.41 1.75,31.36 2.93,31.36
  L2 w1.5: 3.73,49.22 3.73,48.96 3.73,48.067 3.2,47.537 3.2,39.81 2.93,39.54 2.93,31.36 2.93,28.53 3.2,28.26 3.2,22.84 1.81,21.45 1.81,10.566 P4.1@8.495,3.882
  other v1: 3.25,48.33 4,48.39 3.55,48.96 4.18,48.99 3.9,49.58
ACCEL_CS: U5_2.8 U6.19 | length 25.3
  L1 w0.152: v1@-11.53,29.1 v1(-11.424,28.994) -10.892,28.462 U6.19@-10.871,28.462 ; v1(4.75,20.84) 4.76,20.83 4.76,21.415 U5_2.8@5.005,21.66
  L3 w0.152: v1@-11.53,29.1 -9.81,29.1 -8.03,30.88 -4.48,30.88 -3.671,30.071 -3.671,26.171 -2.08,24.58 -0.976,24.58 1.744,21.86 3.73,21.86 v1(4.75,20.84)
ACCL_INT: R11.1 R73.2 R74.2 U5.5 U5_2.11 U6.34 | length 51.1
  L1 w0.152: v1(-15.05,39.79) -14.533,40.307 R73.2@-14.533,40.47 R74.2@-14.533,41.28 ; v1(-14.98,36.82) -14.4,36.24 -14.4,34.087 R11.1@-13.423,33.11 ; U5.5@-12.533,34.858 -13.423,33.968 R11.1@-13.423,33.11 ; v1@-12.405,30.725 -12.31,30.82 -12.31,31.997 R11.1@-13.423,33.11 ; U6.34@-9.456,22.416 -9.464,22.416 -10.06,21.82 -10.06,21.32 -9.23,20.49 -9.23,16.88 -7.89,15.54 -7.2,15.54 v1(-5.63,17.11) ; v1(-1.85,16.89) -1.52,16.89 -0.91,17.5 -0.91,19.32 -0.54,19.69 6.02,19.69 6.43,20.1 U5_2.11@6.43,20.735
  L4 w0.152: v1(-15.05,39.79) -14.98,39.72 v1(-14.98,36.82) ; v1(-12.3,30.62) -12.31,30.63 -12.31,30.06 -12.5,29.87 -12.5,26.3 -10.64,24.44 -10.64,23.6 -10.01,22.97 v1(-10.01,21.51) ; v1(-5.63,17.11) -5.63,16.72 -5.3,16.39 -4.85,16.39 -4.35,16.89 v1(-1.85,16.89)
AU_PWRDN: U6.41 U7.1 | length 14.6
  L1 w0.152: U7.1@-14.049,15.582 -13.622,16.01 -12.581,16.01 -11.901,16.69 v1(-11.901,19.85) ; U6.41@-6.239,23.124 -5.92,22.804 v1@-5.92,22.58
  L4 w0.152: v1@-11.92,19.95 -11.901,19.95 -11.761,19.81 -10.9,19.81 -10.64,20.07 -6.96,20.07 -6.151,20.879 -6.151,21.327 -5.779,21.699 -5.779,22.237 -5.784,22.242 -5.784,22.576 v1@-5.78,22.58
  other v1: -5.78,22.61
CHG_DIS: Q3.1 R31.1 R32.2 U6.27 | length 47.3
  L1 w0.152: v1(-12.64,24.12) -12.64,24.183 U6.27@-11.931,24.891 ; v1(-1.82,30.87) -2.148,31.198 -2.148,40.438 -3.77,42.06 -3.77,42.51 -3.589,42.691 -1.219,42.691 -0.87,43.04 v1(-0.87,44.76) v1@-0.87,44.91 ; R32.2@1.483,50.62 2.247,50.62 R31.1@2.267,50.6 2.267,49.558 Q3.1@2.33,49.495 2.32,49.485 2.32,48.58 v1(2.3,48.56)
  L4 w0.152: v1(-12.64,24.12) -13.42,23.34 -13.42,21.33 -13.16,21.07 -10.778,21.07 -10.441,20.732 -9.598,20.732 -4.244,26.086 -4.244,26.486 -2.29,28.44 -2.29,30.4 v1(-1.82,30.87) ; v1(-0.87,44.76) -0.53,45.1 -0.53,46.281 0.594,47.405 1.104,47.405 v1@2.279,48.581
CHGB: C38.2 R28.1 U6.42 U8.1 | length 40.3
  L1 w0.152: U6.42@-5.886,23.477 -5.886,23.475 -5.11,22.699 -5.11,21.343 C38.2@-5,21.233 -4.99,21.243 R28.1@-4.13,21.243 ; v1@0.25,37.93 -0.21,37.47 -0.21,35.55 2.07,33.27 2.07,29.73 v1(1.36,29.02) ; U8.1@8.23,45.83 8.36,45.7 9.11,45.7 v1(9.48,45.33)
  L4 w0.152: v1@-5.11,21.811 v1(-4.98,21.811) -4.457,21.811 -4.052,21.406 -2.917,21.406 -1.928,22.396 -1.928,25.48 1.36,28.768 v1(1.36,29.02) ; v1(0.32,37.86) 0.46,37.72 3.208,37.72 9.68,44.192 9.68,45.13 v1(9.48,45.33)
DIS_AU_MCU: Q8.1 U6.40 | length 9.7
  L1 w0.152: v1(-12.63,20.03) -12.194,20.466 Q8.1@-12.194,20.91 ; U6.40@-6.593,22.77 -6.23,22.407 v1(-6.23,22.05)
  L4 w0.152: v1(-12.63,20.03) -12.63,20.02 -12.24,20.41 -7.048,20.41 -6.454,21.004 -6.454,21.452 -6.23,21.676 v1(-6.23,22.05)
FL_CS: U4.1 U6.43 | length 11.6
  L1 w0.152: U6.43@-5.532,23.831 -5.21,23.509 -5.21,23.31 -4.73,22.83 -0.96,22.83 -0.6,22.47 -0.6,20.56 -0.339,20.299 2.554,20.299 U4.1@3.055,20.8 ; U4.1@3.07,20.8 U4.1@3.055,20.8 ; U4.1@3.15,20.895 U4.1@3.055,20.8